# Altium PCB PCB1.PcbDoc
Units mil, origin at the board's own origin, x right, y up, seen from the top; angles counter-clockwise.
Board outline 3450 x 2800 mil, 2 copper layers (Top Layer, Bottom Layer); 7 components, 8 nets, 51 pads, 0 vias.
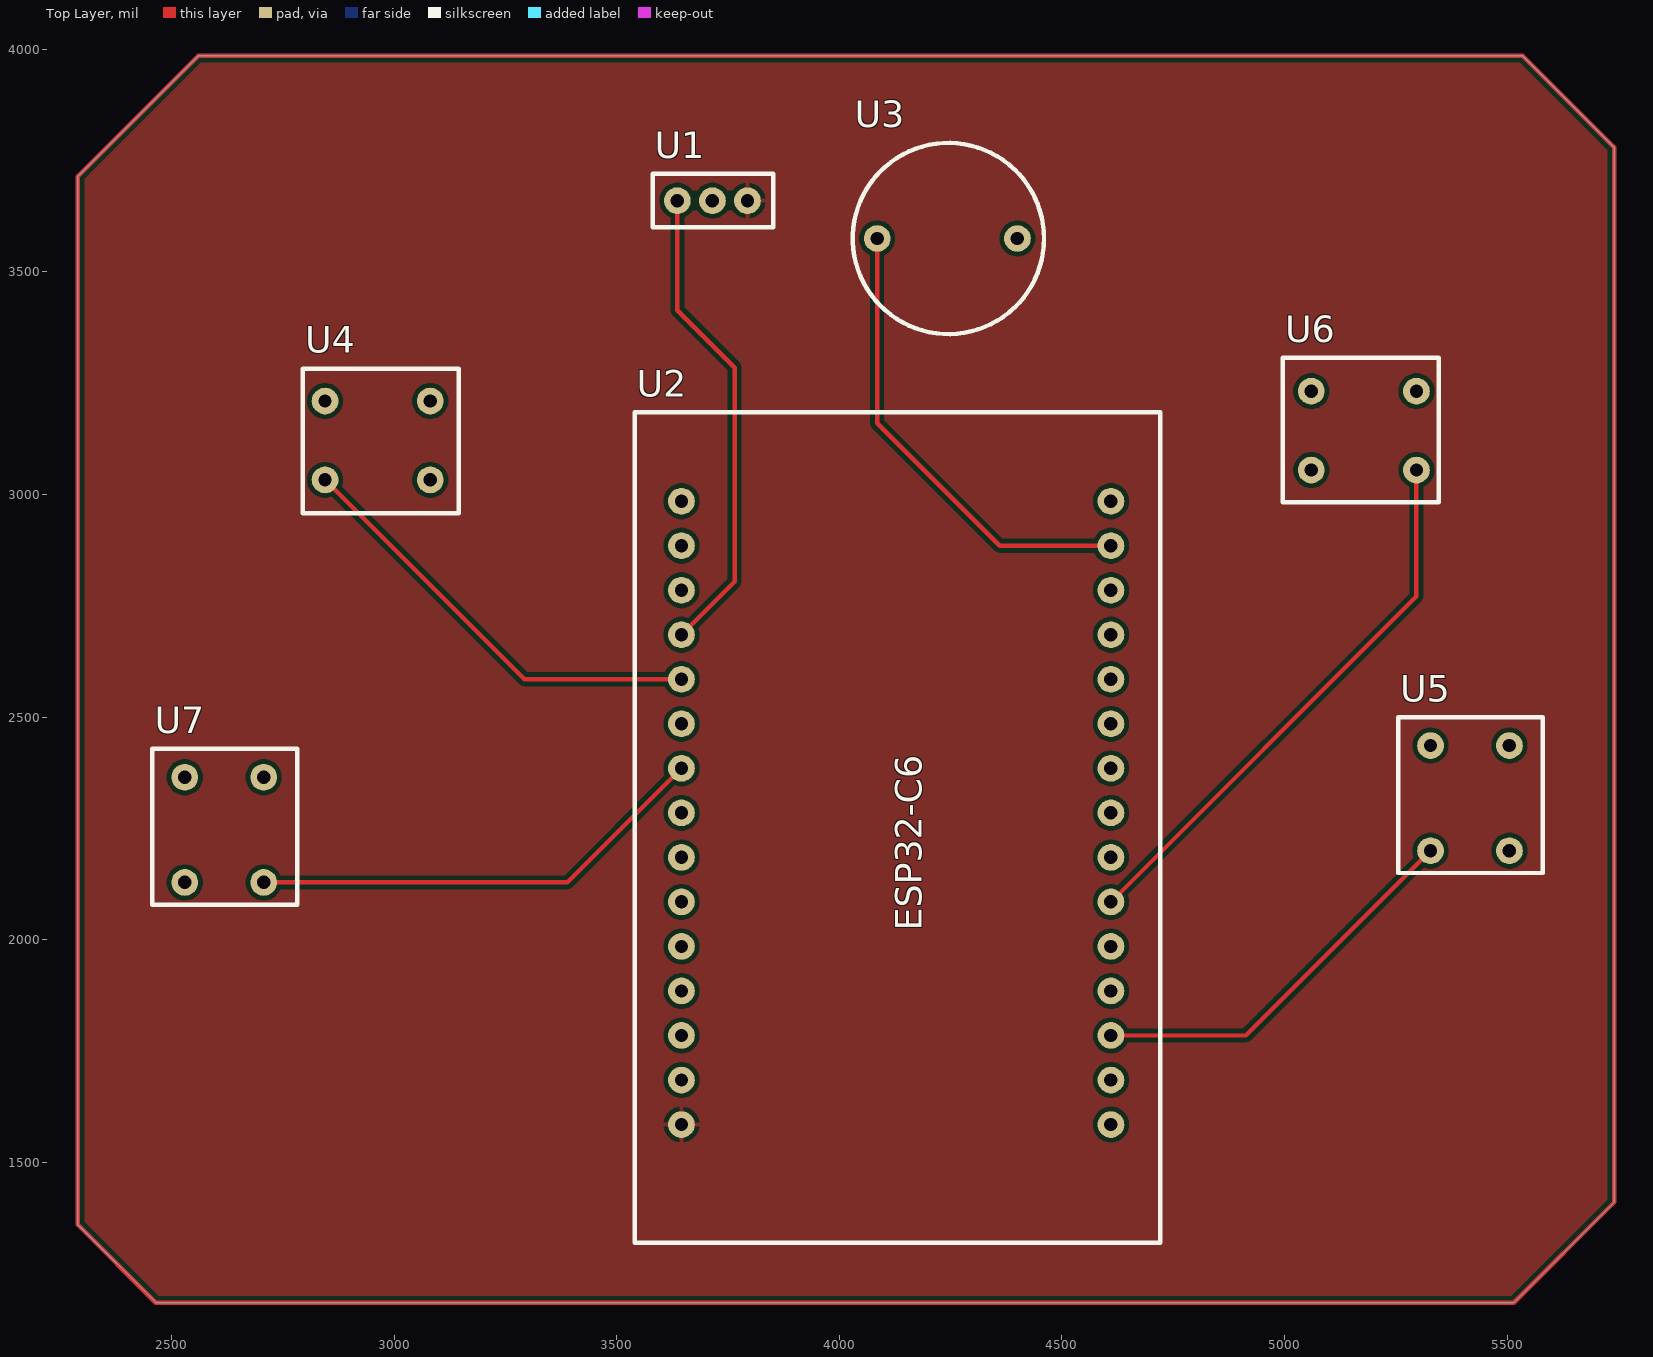
[diagram p0: Top Layer view]
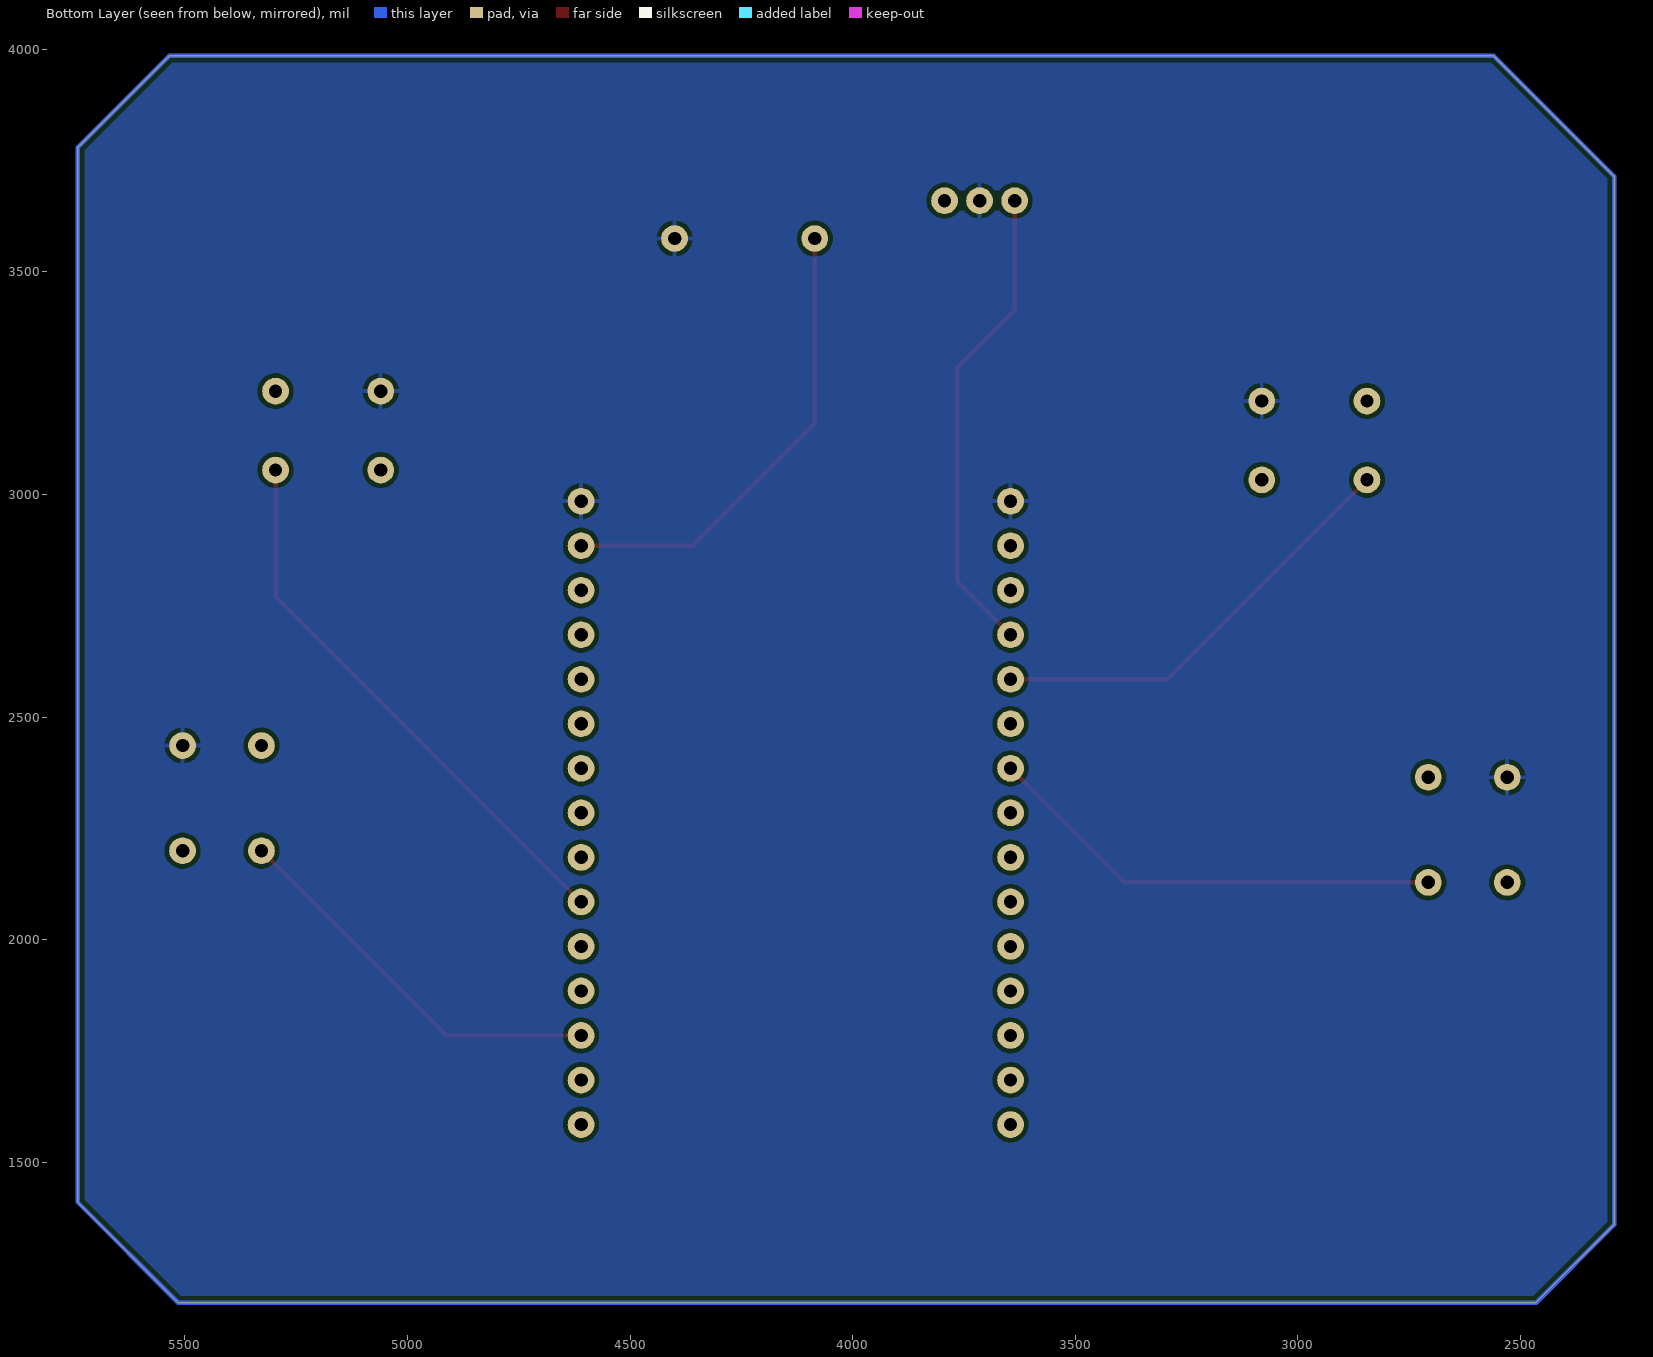
[diagram p1: Bottom Layer view, seen from below]

## Layer stack, top to bottom
Top Solder: solder mask 0.4, Solder Resist, Dk 3.5
Top Layer: signal copper 1.4
Dielectric 1: dielectric 12.6, FR-4, Dk 4.8
Bottom Layer: signal copper 1.4
Bottom Solder: solder mask 0.4, Solder Resist, Dk 3.5

## Board outline
2290,1360 2465,1185 5515,1185 5740,1410 5740,3780 5535,3985 2560,3985 2290,3715

## Design rules (kind name [scope] priority, off if disabled: settings)
Clearance [All] p1: gap=10 ignorepadtopadclearanceinfootprint=FALSE
PolygonConnect [All] p1: connectstyle=Relief reliefconductorwidth=10 reliefentries=4 polygonreliefangle="90 Angle" airgapwidth=10
RoutingVias [All] p1: holewidth=28 width=50 viastyle="Through Hole" minholewidth=28 minwidth=50 maxholewidth=28 maxwidth=50
SolderMaskExpansion [All] p1: expansion=4 istentingtop=FALSE
SupplyNets "Schematic Supply Nets" [InNet('GND')] p1: voltage=0.000
Width [All] p1: maxlimit=10 minlimit=10 preferedwidth=10
30 further rules are at their usual default settings.

## Components (designator, comment, footprint, x,y, rotation, side; value= is the part's Value field where it differs from the comment)
U1 "MatriceLED" MATRICEled 3636.26,3660 r0 top
U2 "ESP32" ESP32 3645.43,1585 r90 top
U3 "Buzzer" BUZZER 4399.96,3575 r180 top
U4 "ButtonL" BOUTON 2845,3032.83 r90 top
U5 "ButtonU" BOUTON 5505,2200 r180 top
U6 "ButtonD" BOUTON 5296.22,3232.16 r270 top
U7 "ButtonR" BOUTON 2707.16,2128.78 r180 top

## Footprints (in the part's own frame and the unit in brackets; to place one, negate y for a bottom-side part, rotate by r counter-clockwise, add the part's x,y. Pads: shape width x height; smd on the part's side, far side on the other; paste and mask are expansions set on the pad)
BOUTON [mil]
  round 60 hole 30: 0(177.17,0) 1(0,0) 2(177.16,-236.22) 3(0,-236.22)
  silkscreen extent -75,-300 250,50
BUZZER [mil]
  round 60 hole 30: 0(0,0) 1(314.96,0)
  silkscreen extent -60,-215 370,215
ESP32 [mil]
  round 60 hole 30: 1(0,-964.57) 2(100,-964.57) 3(200,-964.57) 4(300,-964.57) 5(400,-964.57) 6(500,-964.57) 7(600,-964.57) 8(700,-964.57) 9(800,-964.57) 10(900,-964.57) 11(1000,-964.57) 12(1100,-964.57) 13(1200,-964.57) 14(1300,-964.57) 15(1400,-964.57) 16(1400,0) 17(1300,0) 18(1200,0) 19(1100,0) 20(1000,0) 21(900,0) 22(800,0) 23(700,0) 24(600,0) 25(500,0) 26(400,0) 27(300,0) 28(200,0) 29(100,0) 30(0,0)
  silkscreen extent -265,-1075 1600,105
MATRICEled [mil]
  round 60 hole 30: 0(0,0) 1(78.74,0) 2(157.48,0)
  silkscreen extent -55,-60 215,60

## Part data
U2: library part ESP32C6
U4 U5 U6 U7: library part Button

## Nets (pads, with @x,y where several pads share a name; then routed paths per layer and width w, separated by ;. In a path a pad name is that pad's centre, name@x,y a point inside that pad or via, vN(x,y) a via of type N, cw(c..) or ccw(c..) an arc to the next point about the centre after c; other vN are vias at no path point)
GND: U1.1 U2.15 U2.16 U3.0 U4.2 U5.3 U6.3 U7.2
NetU1_0: U1.0 U2.19 | length 1077.9
  Top Layer w10: U1.0 3636.26,3413.74 3765,3285 3765,2804.57 U2.19
NetU1_2: U1.2 U2.30
NetU2_3: U2.3 U5.0 | length 889.7
  Top Layer w10: U2.3 4912.83,1785 U5.0
NetU2_6: U2.6 U6.0 | length 1254.2
  Top Layer w10: U2.6 5296.22,2771.22 U6.0
NetU2_14: U2.14 U3.1 | length 1053.9
  Top Layer w10: U3.1 4085,3160 4360,2885 U2.14
NetU2_20: U2.20 U4.1 | length 985.9
  Top Layer w10: U4.1 3292.83,2585 U2.20
NetU2_22: U2.22 U7.1 | length 1044.4
  Top Layer w10: U7.1 3389.21,2128.78 U2.22
pads on no net: U2.1 U2.2 U2.4 U2.5 U2.7 U2.8 U2.9 U2.10 U2.11 U2.12 U2.13 U2.17 U2.18 U2.21 U2.23 U2.24 U2.25 U2.26 U2.27 U2.28 U2.29 U4.0 U4.3 U5.1 U5.2 U6.1 U6.2 U7.0 U7.3
copper on no net: | length 27239.8
  Top Layer w10: 2560,3985 5535,3985 ; 2560,3985 2290,3715 2290,1360 2465,1185 5515,1185 5740,1410 5740,3780 ; 2560,3985 5535,3985 ; 5535,3985 5740,3780 ; 5535,3985 5740,3780
  Bottom Layer w10: 2290,1360 2290,3715 2560,3985 5535,3985 5740,3780 5740,1410 5515,1185 2465,1185 2290,1360

## Polygon pours and split planes (outlines as drawn)
GND on Bottom Layer "GND_L02_P000" (solid, pour order 0): 2290,3715 2560,3985 5535,3985 5740,3780 5740,1410 5515,1185 2465,1185 2290,1360
NetU1_2 on Top Layer "NETU1_2_L01_P001" (solid, pour order 1): 2290,3715 2560,3985 5535,3985 5740,3780 5740,1410 5515,1185 2465,1185 2290,1360

## Text inside footprints (layer, text, board x,y; h text height)
U2: Top Overlay "ESP32-C6" at 4185.43,2020 h60 r90